# EAGLE board data_proV2.0 - A Curtis (EAGLE 7.7.0)
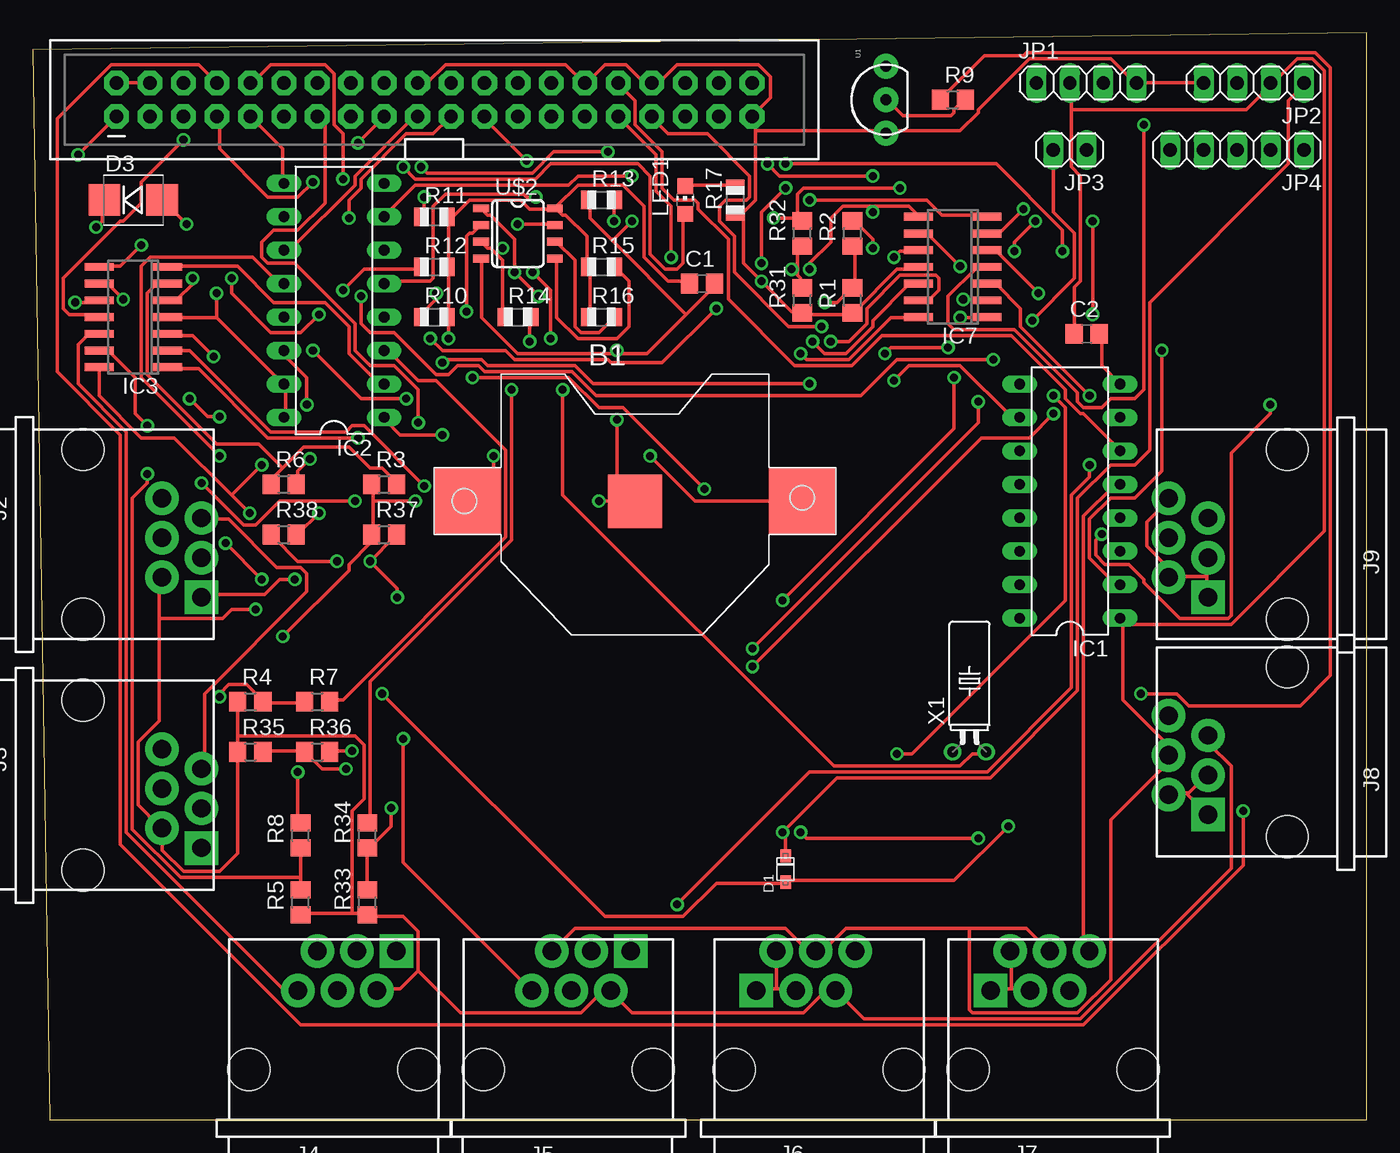
[diagram p0: board, top side]
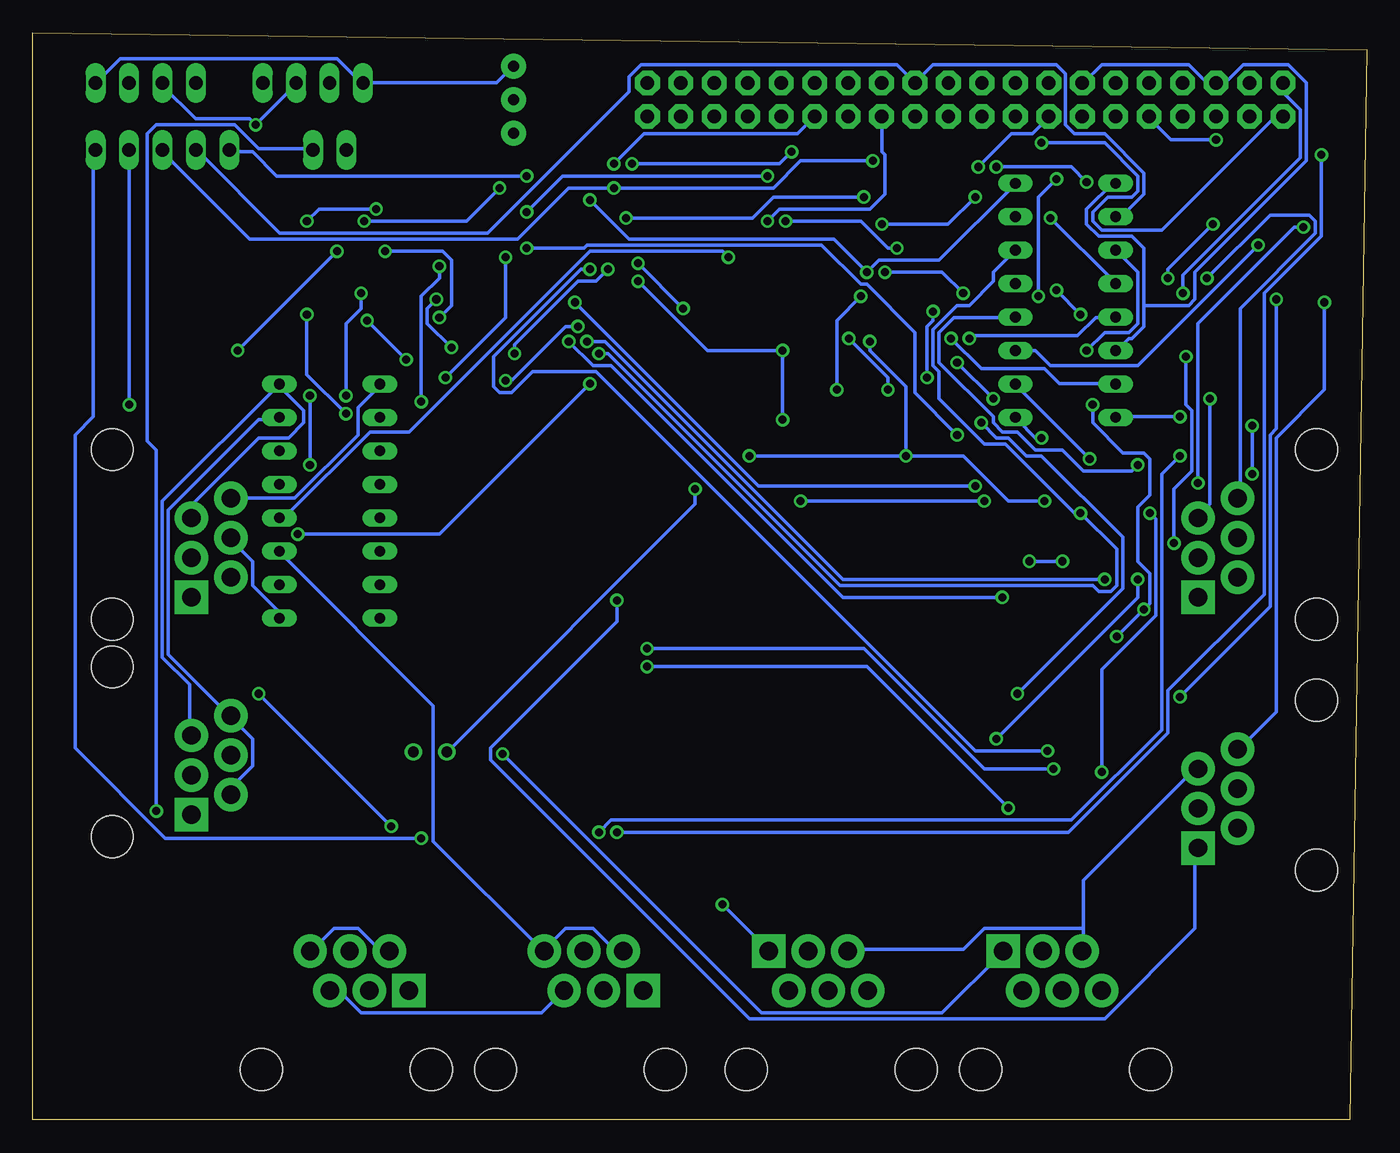
[diagram p1: board, bottom side, seen from below]

Size 101.27 x 82.54 mm. Coordinates in mm from the lower left corner, seen from the top.
Outline: 1.27,0 101.27,0 101.27,82.54 0,81.27 1.27,0
Copper layers (1*16): Top 0.035mm / dielectric 1.5mm / Bottom 0.035mm
Design rules "default": minimum track width 10mil, minimum drill 24mil, track to track 8mil, track to pad 8mil, pad to pad 8mil, via to via 8mil, smd to smd 8mil, copper to edge 40mil, drill to drill 8mil, minimum pad ring 10mil, minimum via ring 8mil, stop-mask expansion 4mil, vias tented up to drill 0mil, thermal gap 10mil

## Footprints (pad centres in the part's own frame; a part is rotated, then mirrored left to right if it is on the bottom)
CR2032-SMD = smd 5.08 x 5.08: +$1 -12.7,0; +$2 12.7,0 | smd 4.064 x 4.064: - 0,0
C0805 = smd 1.3 x 1.5: 1 -0.95,0; 2 0.95,0
SOD-323F = smd 1 x 0.8: A -1,0; C 1,0
SMB-DIODE = smd 2.4 x 2.4: A 2.2,0; C -2.2,0
DIL16 = drill 0.813 long: 1 -8.89,-3.81; 2 -6.35,-3.81; 3 -3.81,-3.81; 4 -1.27,-3.81; 5 1.27,-3.81; 6 3.81,-3.81; 7 6.35,-3.81; 8 8.89,-3.81; 9 8.89,3.81; 10 6.35,3.81; 11 3.81,3.81; 12 1.27,3.81; 13 -1.27,3.81; 14 -3.81,3.81; 15 -6.35,3.81; 16 -8.89,3.81
SO14 = smd 0.6 x 2.2: 1 -3.81,-2.6; 2 -2.54,-2.6; 3 -1.27,-2.6; 4 0,-2.6; 5 1.27,-2.6; 6 2.54,-2.6; 7 3.81,-2.6; 8 3.81,2.6; 9 2.54,2.6; 10 1.27,2.6; 11 0,2.6; 12 -1.27,2.6; 13 -2.54,2.6; 14 -3.81,2.6
2X20-SHROUDED = drill 1.016 pad 1.88 octagon: 1 -1.27,24.13; 2 1.27,24.13; 3 -1.27,21.59; 4 1.27,21.59; 5 -1.27,19.05; 6 1.27,19.05; 7 -1.27,16.51; 8 1.27,16.51; 9 -1.27,13.97; 10 1.27,13.97; 11 -1.27,11.43; 12 1.27,11.43; 13 -1.27,8.89; 14 1.27,8.89; 15 -1.27,6.35; 16 1.27,6.35; 17 -1.27,3.81; 18 1.27,3.81; 19 -1.27,1.27; 20 1.27,1.27; 21 -1.27,-1.27; 22 1.27,-1.27; 23 -1.27,-3.81; 24 1.27,-3.81; 25 -1.27,-6.35; 26 1.27,-6.35; 27 -1.27,-8.89; 28 1.27,-8.89; 29 -1.27,-11.43; 30 1.27,-11.43; 31 -1.27,-13.97; 32 1.27,-13.97; 33 -1.27,-16.51; 34 1.27,-16.51; 35 -1.27,-19.05; 36 1.27,-19.05; 37 -1.27,-21.59; 38 1.27,-21.59; 39 -1.27,-24.13; 40 1.27,-24.13
BTA = drill 1.4 pad 2.54 square: 1 4.75,9 | drill 1.4 pad 2.54: 2 3.25,6; 3 1.75,9; 4 0.25,6; 5 -1.25,9; 6 -2.75,6 | hole 3.2: 6.45,0; -6.45,0
BTD = drill 1.4 pad 2.54 square: 1 -4.75,6 | drill 1.4 pad 2.54: 2 -3.25,9; 3 -1.75,6; 4 -0.25,9; 5 1.25,6; 6 2.75,9 | hole 3.2: 6.45,0; -6.45,0
1X04 = drill 1.016 long: 1 -3.81,0; 2 -1.27,0; 3 1.27,0; 4 3.81,0
1X02 = drill 1.016 long: 1 -1.27,0; 2 1.27,0
1X05 = drill 1.016 long: 1 -5.08,0; 2 -2.54,0; 3 0,0; 4 2.54,0; 5 5.08,0
CHIP-LED0805 = smd 1.2 x 1.2: A 0,-1.05; C 0,1.05
R0805 = smd 1.3 x 1.5: 1 -0.95,0; 2 0.95,0
R0805' = smd 1.1 x 1.4: 1 -1,0; 2 1,0
TO-92-AMMO = drill 0.813 pad 1.88: 1 -2.54,0; 2 0,0; 3 2.54,0
SO08-TIGHT = smd 0.6 x 1.2: 1 -1.905,-2.8; 2 -0.635,-2.8; 3 0.635,-2.8; 4 1.905,-2.8; 5 1.905,2.8; 6 0.635,2.8; 7 -0.635,2.8; 8 -1.905,2.8
TC38H = drill 0.813: 1 -1.27,0; 2 1.27,0

## Placement (x,y rotation side)
B1  CR2032  [CR2032-SMD]  45.72,46.99 0 top
C1  0.1uFd  [C0805]  50.8,63.5 0 top
C2  0.1uFd  [C0805]  80.01,59.69 0 top
D1  [SOD-323F]  57.15,19.05 90 top
D3  [SMB-DIODE]  7.62,69.85 0 top
IC1  4049N  [DIL16]  78.74,46.99 90 top
IC2  MCP3008  [DIL16]  22.86,62.23 90 top
IC3  LM324D  [SO14]  7.62,60.96 90 top
IC7  LM324D  [SO14]  69.85,64.77 90 top
J1  RASPBERRYPI-40-PIN-GPIO  [2X20-SHROUDED]  30.48,77.47 90 top
J2  A2  [BTA]  3.81,44.45 270 top
J3  A3  [BTA]  3.81,25.4 270 top
J4  A4  [BTA]  22.86,3.81 0 top
J5  A1  [BTA]  40.64,3.81 0 top
J6  D1  [BTD]  59.69,3.81 0 top
J7  D2  [BTD]  77.47,3.81 0 top
J8  D3  [BTD]  95.25,27.94 90 top
J9  D4  [BTD]  95.25,44.45 90 top
JP1  [1X04]  80.01,78.74 0 top
JP2  [1X04]  92.71,78.74 180 top
JP3  [1X02]  78.74,73.66 180 top
JP4  [1X05]  91.44,73.66 180 top
LED1  [CHIP-LED0805]  49.53,69.85 0 top
R1  1k  [R0805]  62.23,62.23 90 top
R2  1k  [R0805]  62.23,67.31 90 top
R3  1k  [R0805]  26.67,48.26 0 top
R4  1k  [R0805]  16.51,31.75 0 top
R5  1k  [R0805]  20.32,16.51 90 top
R6  1k  [R0805]  19.05,48.26 0 top
R7  1k  [R0805]  21.59,31.75 0 top
R8  1k  [R0805]  20.32,21.59 90 top
R9  4.7k  [R0805]  69.85,77.47 0 top
R10  N/A?  [R0805']  30.48,60.96 0 top
R11  3.3k  [R0805']  30.48,68.58 0 top
R12  200  [R0805']  30.48,64.77 0 top
R13  1.5M  [R0805']  43.18,69.85 0 top
R14  510K  [R0805']  36.83,60.96 0 top
R15  3.3k  [R0805']  43.18,64.77 0 top
R16  3.3k  [R0805']  43.18,60.96 0 top
R17  1k  [R0805']  53.34,69.85 90 top
R31  1k  [R0805]  58.42,62.23 90 top
R32  1k  [R0805]  58.42,67.31 90 top
R33  1k  [R0805]  25.4,16.51 90 top
R34  1k  [R0805]  25.4,21.59 90 top
R35  1k  [R0805]  16.51,27.94 0 top
R36  1k  [R0805]  21.59,27.94 0 top
R37  1k  [R0805]  26.67,44.45 0 top
R38  1k  [R0805]  19.05,44.45 0 top
U1  DS18B20  [TO-92-AMMO]  64.77,77.47 90 top
U$2  DS1307SO8-TIGHT  [SO08-TIGHT]  36.83,67.31 270 top
X1  32.768khz  [TC38H]  71.12,27.94 0 top

## Library data of the parts
B1 D1 IC2 R10-R17 = adafruit
C1 C2 R1-R9 R31-R38 = resistor
D3 = SparkFun-DiscreteSemi; PROD_ID: DIO-09646
IC1 = 40xx
IC3 IC7 = linear
J1 = SparkFun-Boards
J2-J9 = SparkFun-Connectors
JP1-JP4 = pinhead
LED1 = led
U1 = SparkFun-Sensors; STORE_ID: SEN-00245
U$2 = SparkFun-FreqCtrl; PROD_ID: IC-08138
X1 = crystal; OC_FARNELL: unknown; OC_NEWARK: unknown

## Nets
3.3V: D1.C J1.1 J1.17 JP1.1 JP2.1 U1.3
5V: C1.1 C2.1 IC1.1 IC2.15 IC2.16 IC3.4 J1.2 J1.4 J2.5 J3.5 J4.5 J5.5 J6.4 J7.4 J8.4 J9.4 JP1.2 JP2.2 R10.2 R11.2 R12.2 R15.1 R16.1 U$2.8
+15V: IC7.4 JP1.3 JP2.3
A1: IC2.1 IC3.1 R2.2
A2: IC2.2 IC3.7 R6.2
A3: IC2.3 IC3.8 R7.2
A4: IC2.4 IC3.14 R8.2
A5: IC2.5 IC7.1 R32.2
A6: IC2.6 IC7.14 R38.2
A7: IC2.7 IC7.8 R36.2
A8: IC2.8 IC7.7 R34.2
BATT: R13.2 R14.1 U$2.3
CE: J1.15 JP4.5
CSN: IC2.10 J1.24 JP4.4
D1: IC1.2 J1.29
D2: IC1.4 J1.31
D3: IC1.6 J1.32
D4: IC1.10 J1.33
DQ: D1.A J1.13 R9.1
GND: B1.- C1.2 C2.2 IC1.8 IC2.9 IC2.14 IC3.11 IC7.11 J1.6 J1.9 J1.14 J1.20 J1.25 J1.30 J1.34 J1.39 J2.2 J3.2 J4.2 J5.2 J6.5 J7.5 J8.5 J9.5 JP1.4 JP2.4 R1.1 R3.1 R4.1 R5.1 R13.1 R17.1 R31.1 R33.1 R35.1 R37.1 U1.1 U$2.4
MISO: IC2.12 J1.21 JP4.1
MOSI: IC2.11 J1.19 JP4.2
N$1: U$2.2 X1.1
N$2: R10.1 U$2.1 X1.2
N$3: B1.+$1 B1.+$2 D3.C R14.2
N$4: J1.7 LED1.A
N$5: IC3.2 R1.2 R2.1
N$6: R9.2 U1.2
N$7: IC3.13 R5.2 R8.1
N$8: IC3.6 R3.2 R6.1
N$10: D3.A R12.1
N$11: IC1.3 J6.1 J6.2 J6.3 J6.6
N$12: IC1.5 J7.1 J7.2 J7.3 J7.6
N$14: IC1.7 J8.1 J8.2 J8.3 J8.6
N$15: IC1.9 J9.1 J9.2 J9.3 J9.6
N$16: IC3.9 R4.2 R7.1
N$17: LED1.C R17.2
N$30: IC3.3 J5.6
N$31: IC7.2 R31.2 R32.1
N$32: IC7.3 J5.1
N$33: IC7.6 R33.2 R34.1
N$34: IC7.9 R35.2 R36.1
N$35: IC7.13 R37.2 R38.1
N$36: IC7.12 J2.1
RX: J1.10 JP3.2
S1-5V1: IC3.5 J2.6
S1-5V2: IC3.10 J3.6
S1-5V3: IC7.5 J4.1
S1-5V4: IC3.12 J4.6
S1-5V5: IC7.10 J3.1
SCK: IC2.13 J1.23 JP4.3
SCL: R16.2 U$2.6
SDA: R15.2 U$2.5
SQ: R11.1 U$2.7
TX: J1.8 JP3.1

## Tracks (layer width: path | path; a pad name or v marks a point on that pad's centre or on a via)
3.3V  (via drill 0.61)
  Top 0.254: v24.69,74.19 26.52,76.02 J1.17 | 57.15,21.84 57.15,22.07 61.04,25.96 72.69,25.96 79.32,32.59 79.32,47.22 81.84,49.73 83.67,49.73 84.81,50.88 84.81,62.08 95.33,72.59 95.33,77.39 96.47,78.54 JP2.1 | 57.15,21.84 D1.C | v3.43,73.28 J1.1 | 57.15,21.84 v56.92,21.84
  Bottom 0.254: v24.69,74.19 19.89,74.19 17.37,71.68 17.37,70.54 17.83,70.08 19.66,70.08 20.8,68.94 20.8,68.25 20.12,67.56 15.54,67.56 7.09,76.02 6.4,76.02 J1.1 | U1.3 64.92,79.91 66.06,78.77 76.12,78.77 JP1.1 76.35,78.77 78.18,80.59 94.64,80.59 96.47,78.77 JP2.1 | v3.43,73.28 3.43,67.11 7.77,62.76 7.77,39.9 15.09,32.59 15.09,29.39 22.63,21.84 v56.92,21.84
5V  (via drill 0.61)
  Top 0.254: U$2.8 39.78,69.16 40.23,68.71 40.46,68.71 42.06,67.11 42.06,64.82 R15.1 42.29,64.59 42.29,61.16 R16.1 | C1.1 49.84,63.68 48.23,63.68 46.41,65.51 46.41,69.39 44.81,70.99 41.38,70.99 39.78,69.39 U$2.8 | U$2.8 39.55,69.16 37.72,69.16 37.03,69.85 33.15,69.85 32,68.71 31.55,68.71 R11.2 31.55,68.48 31.55,64.82 R12.2 31.55,64.59 31.55,61.16 R10.2 31.55,60.94 v31.55,59.33 | J1.2 6.4,78.77 8.69,78.77 J1.4 | 13.95,60.94 10.29,60.94 IC3.4 | 13.95,60.94 18.97,55.91 IC2.15 19.2,55.68 19.2,53.39 IC2.16 | 13.95,60.94 v13.95,62.76 | 78.87,76.71 78.87,78.54 JP1.2 | 78.87,76.71 78.87,72.36 79.55,71.68 79.55,63.68 79.1,63.22 79.1,59.79 C2.1 | 78.87,76.71 92.13,76.71 93.95,78.54 JP2.2 94.18,78.77 96.01,80.59 97.16,80.59 98.07,79.68 98.07,44.7 90.98,37.62 82.75,37.62 | 82.75,37.62 82.75,38.08 IC1.1 82.75,37.62 | 82.75,37.62 82.75,31.9 86.18,28.47 86.18,27.79 J8.4 86.18,27.56 86.18,27.1 81.84,22.76 81.84,10.64 79.32,8.13 71.32,8.13 71.09,8.36 71.09,14.53 | 71.09,14.53 75.44,14.53 77.04,12.93 J7.4 | 71.09,14.53 61.72,14.53 60.12,12.93 59.66,12.93 J6.4 59.44,12.93 58.75,12.93 57.15,14.53 41.15,14.53 39.55,12.93 J5.5 | J2.5 13.03,45.62 14.86,45.62 18.52,41.96 20.34,41.96 20.8,41.5 20.8,40.13 13.03,32.36 13.03,26.87 J3.5 | v14.17,53.39 13.26,53.39 v11.89,54.76
  Bottom 0.254: v13.95,62.76 13.95,64.14 5.03,73.05 5.03,76.71 6.17,77.85 6.17,78.54 J1.2 | v31.55,59.33 29.26,57.05 24.46,57.05 23.32,55.91 19.2,55.91 IC2.15 | IC1.1 82.75,38.3 82.75,38.76 84.58,40.59 84.58,42.42 86.18,44.02 J9.4 | 21.49,14.53 21.49,18.19 13.03,26.64 J3.5 | 21.49,14.53 21.49,12.93 J4.5 | 21.49,14.53 29.03,14.53 30.63,12.93 39.32,12.93 J5.5 | v14.17,53.39 18.97,53.39 IC2.16 | v11.89,54.76 11.89,46.76 12.8,45.85 J2.5
+15V  (via drill 0.61)
  Top 0.254: v84.35,75.56 84.35,55.45 83.67,54.76 81.84,54.76 81.15,54.08 79.78,54.08 79.32,54.53 79.32,55.22 74.52,60.02 69.95,60.02 69.49,60.48 69.49,62.54 71.55,64.59 72.24,64.59 IC7.4
  Bottom 0.254: JP1.3 81.38,78.54 v84.35,75.56 84.81,76.02 88.92,76.02 91.44,78.54 JP2.3
A1  (via drill 0.61)
  Top 0.254: v63.78,66.19 63.78,66.88 62.41,68.25 R2.2 | v31.09,52.02 27.89,52.02 26.75,53.16 IC2.1 | v24.69,51.79 17.83,51.79 12.57,57.05 10.29,57.05 IC3.1
  Bottom 0.254: v63.78,66.19 59.44,66.19 59.21,66.42 41.38,66.42 38.41,63.45 37.95,63.45 34.29,59.79 34.29,55.22 v31.09,52.02 | v24.69,51.79 25.15,51.79 26.52,53.16 IC2.1
A2  (via drill 0.61)
  Top 0.254: v21.03,50.19 20.12,49.28 20.12,48.36 R6.2 | IC3.7 10.29,64.82 15.54,64.82 18.29,62.08 22.17,62.08 24,60.25 24,58.19 26.52,55.68 IC2.2
  Bottom 0.254: v21.03,50.19 26.52,55.68 IC2.2
A3  (via drill 0.61)
  Top 0.254: IC2.3 26.98,58.42 29.26,56.13 30.63,56.13 35.89,50.88 35.89,44.25 23.55,31.9 22.63,31.9 R7.2 | v8.23,66.42 6.63,64.82 5.03,64.82 IC3.8
  Bottom 0.254: v8.23,66.42 17.37,57.28 24,57.28 25.15,58.42 IC2.3
A4  (via drill 0.61)
  Top 0.254: v20.12,26.42 20.12,22.76 R8.2 | 15.09,47.45 10.74,51.79 8.23,51.79 5.03,54.99 5.03,57.05 IC3.14 | 15.09,47.45 v16.46,46.08 | 15.09,47.45 v17.37,49.73
  Bottom 0.254: v20.12,26.42 20.12,34.19 16,38.3 16,45.62 v16.46,46.08 | v17.37,49.73 17.83,49.28 21.49,49.28 23.09,50.88 25.15,50.88 26.52,52.25 27.66,52.25 28.35,52.93 28.35,53.39 32.46,57.51 32.46,59.79 31.32,60.94 26.75,60.94 IC2.4
A5  (via drill 0.61)
  Top 0.254: v56.24,68.48 58.06,68.48 | 58.06,68.48 58.29,68.48 R32.2 58.06,68.48 | v38.18,70.08 37.49,70.08 37.26,70.31 31.32,70.31 30.4,69.39 30.4,63.91 30.18,63.68 26.75,63.68 IC2.5 | v70.41,60.94 72.24,60.94 IC7.1 | v74.52,65.96 74.52,66.65 v76.12,68.25 | v65.84,70.76 58.52,70.76 58.06,70.31 58.06,68.48
  Bottom 0.254: v56.24,68.48 46.63,68.48 45.03,70.08 v38.18,70.08 | v70.41,60.94 69.49,61.85 69.49,65.28 70.18,65.96 v74.52,65.96 | v76.12,68.25 68.35,68.25 v65.84,70.76
A6  (via drill 0.61)
  Top 0.254: v21.72,46.08 20.12,44.48 R38.2 | v58.29,58.19 58.75,57.73 61.95,57.73 65.15,60.94 67.21,60.94 IC7.14
  Bottom 0.254: IC2.6 28.35,64.36 28.35,63.68 30.18,61.85 31.09,61.85 32.92,60.02 32.92,57.28 32.46,56.82 32.46,54.76 29.03,51.33 27.43,51.33 22.17,46.08 v21.72,46.08 18.97,43.33 18.97,40.59 19.43,40.13 20.34,40.13 20.8,40.59 40.01,40.59 57.61,58.19 v58.29,58.19
A7  (via drill 0.61)
  Top 0.254: v24.23,28.02 22.63,28.02 R36.2 | v58.98,64.59 58.98,65.05 60.58,66.65 60.58,68.48 61.49,69.39 63.78,69.39 | 63.78,69.39 66.52,69.39 67.21,68.71 IC7.8 | v45.49,71.68 41.38,71.68 40.69,70.99 29.03,70.99 26.75,68.71 IC2.7 | 63.78,69.39 v63.78,68.94
  Bottom 0.254: v24.23,28.02 29.72,28.02 58.52,56.82 63.32,56.82 64.92,55.22 65.84,55.22 66.29,55.68 66.29,57.96 59.66,64.59 v58.98,64.59 | v45.49,71.68 61.04,71.68 v63.78,68.94
A8  (via drill 0.61)
  Top 0.254: v36.35,55.45 36.35,44.02 25.6,33.27 25.6,22.76 R34.2 | v39.32,59.33 39.32,62.99 v37.95,64.36 | v58.98,69.85 67.89,69.85 69.04,68.71 72.24,68.71 IC7.7
  Bottom 0.254: v36.35,55.45 36.35,56.36 v39.32,59.33 | IC2.8 26.75,70.99 32.46,65.28 37.03,65.28 v37.95,64.36 40.46,66.88 56.01,66.88 v58.98,69.85
BATT  (via drill 0.61)
  Top 0.254: 35.2,65.73 35.66,65.28 35.66,61.16 R14.1 | 35.2,65.73 34.75,66.19 34.52,66.19 34.06,66.65 U$2.3 | v44.12,68.25 44.12,69.85 R13.2 | 35.2,65.73 v35.66,66.19
  Bottom 0.254: v44.12,68.25 38.41,68.25 36.35,66.19 v35.66,66.19
CE  (via drill 0.61)
  Top 0.254: v63.78,71.68 56.69,71.68 v55.78,72.59 | v43.66,73.51 39.55,73.51 37.95,71.91 29.95,71.91 v29.49,72.36
  Bottom 0.254: v63.78,71.68 82.75,71.68 84.58,73.51 86.18,73.51 JP4.5 | v55.78,72.59 44.58,72.59 v43.66,73.51 | v29.49,72.36 26.98,74.88 25.38,74.88 24.23,76.02 J1.15
CSN
  Bottom 0.254: 34.29,78.77 32.92,80.14 23.55,80.14 22.86,79.45 22.86,75.56 22.17,74.88 19.89,74.88 16.92,71.91 16.92,70.31 18.52,68.71 18.97,68.71 IC2.10 | 34.29,78.77 35.66,80.14 55.09,80.14 56.01,79.22 56.01,78.08 66.75,67.33 82.53,67.33 88.7,73.51 JP4.4 | 34.29,78.77 J1.24
D1  (via drill 0.61)
  Top 0.254: v85.72,58.42 85.72,49.28 83.67,47.22 81.84,47.22 80.24,45.62 80.24,42.65 82.07,40.82 82.53,40.82 IC1.2 | v78.18,65.96 78.18,67.56 73.15,72.59 v57.15,72.59
  Bottom 0.254: v78.18,65.96 v85.72,58.42 | v57.15,72.59 54.86,74.88 43.2,74.88 42.06,76.02 J1.29
D2  (via drill 0.61)
  Top 0.254: v48.46,65.51 48.46,69.39 47.32,70.54 47.32,73.28 44.58,76.02 J1.31
  Bottom 0.254: v48.46,65.51 48.92,65.96 58.98,65.96 72.69,52.25 75.67,52.25 82.07,45.85 82.53,45.85 IC1.4
D3
  Top 0.254: IC1.6 82.53,50.88 79.78,53.62 79.55,53.62 78.41,54.76 78.41,55.45 74.3,59.56 64.47,59.56 62.18,57.28 57.84,57.28 52.81,62.31 52.81,66.88 50.52,69.16 50.52,69.62 50.29,69.85 48.69,69.85 47.78,70.76 47.78,73.51 45.72,75.56 45.72,77.39 44.58,78.54 J1.32
D4  (via drill 0.61)
  Top 0.254: v65.38,56.13 66.52,57.28 70.41,57.28 74.3,53.39 74.75,53.39 IC1.10 | v59.89,60.25 57.38,60.25 53.26,64.36 53.26,67.11 52.12,68.25 52.12,69.39 52.58,69.85 54.18,69.85 54.41,70.08 54.41,71.68 51.21,74.88 48.23,74.88 47.09,76.02 J1.33
  Bottom 0.254: v65.38,56.13 64.92,56.13 60.81,60.25 v59.89,60.25
DQ  (via drill 0.61)
  Top 0.254: v26.52,32.36 43.43,15.44 49.38,15.44 51.89,17.96 57.15,17.96 D1.A 57.15,18.19 69.95,18.19 v74.07,22.3 | v29.26,52.93 29.26,55.45 27.43,57.28 25.6,57.28 24.46,58.42 24.46,60.48 19.89,65.05 17.83,65.05 17.37,65.51 17.37,66.65 18.29,67.56 20.12,67.56 22.17,69.62 22.17,75.56 21.72,76.02 J1.13 | v84.12,32.36 86.87,32.36 87.78,31.45 96.24,31.45 98.53,33.73 98.53,79.91 97.38,81.05 75.44,81.05 75.21,80.82 72.24,80.82 69.04,77.62 R9.1
  Bottom 0.254: v26.52,32.36 18.52,40.36 18.52,44.25 24.69,50.42 25.83,50.42 27.2,51.79 28.12,51.79 v29.26,52.93 | v74.07,22.3 v84.12,32.36
GND  (via drill 0.61)
  Top 0.254: 25.83,46.99 25.83,48.13 R3.1 | 25.83,46.99 25.83,44.48 R37.1 25.6,44.25 25.6,43.79 24,42.19 24,41.73 v18.97,36.7 | v29.03,46.99 25.83,46.99 | 44.35,46.99 v42.98,46.99 | 44.35,58.19 46.63,58.19 49.61,61.16 | 44.35,58.19 36.8,58.19 34.06,60.94 34.06,65.28 U$2.4 | 49.61,61.16 51.89,63.45 C1.2 | 49.61,61.16 43.89,66.88 | 43.89,66.88 42.29,68.48 42.29,69.85 R13.1 | v45.49,68.25 44.12,66.88 43.89,66.88 | v44.35,53.16 44.35,46.99 | 44.35,58.19 v44.35,58.42 | 44.35,46.99 B1.- | J1.20 29.26,78.77 29.95,78.77 31.32,80.14 40.46,80.14 41.83,78.77 J1.30 42.06,78.77 43.43,80.14 45.03,80.14 46.41,78.77 46.86,78.77 J1.34 47.09,78.77 47.55,78.77 48.92,80.14 55.09,80.14 56.01,79.22 56.01,77.62 54.63,76.25 J1.39 54.63,76.02 54.86,75.79 54.86,75.11 | IC7.11 67.21,64.59 65.61,64.59 62.41,61.39 R1.1 62.18,61.16 58.52,61.16 R31.1 58.29,61.39 57.61,61.39 v55.32,63.68 53.95,65.05 53.95,68.94 | JP2.4 88.7,78.77 83.9,78.77 JP1.4 83.67,78.77 81.84,80.59 75.67,80.59 71.78,76.71 71.78,76.48 70.41,75.11 64.92,75.11 U1.1 64.69,75.11 54.86,75.11 | 53.95,68.94 53.49,68.94 R17.1 53.95,68.94 | 53.95,68.94 54.86,69.85 54.86,75.11 | IC1.8 81.15,57.28 81.15,59.56 C2.2 | v11.43,74.42 8.23,71.22 8.23,69.62 6.86,68.25 6.63,68.25 2.29,63.91 2.29,61.62 2.74,61.16 4.8,61.16 IC3.11 | J1.9 18.97,73.74 18.97,71.22 IC2.9 | 15.54,29.16 15.54,31.67 R4.1 | 15.54,29.16 15.54,28.02 R35.1 15.54,27.79 15.54,20.24 14.17,18.87 11.43,18.87 9.83,20.47 9.83,22.07 J3.2 9.6,22.3 8,23.9 8,28.7 9.6,30.3 9.6,38.08 | 9.6,38.08 9.6,41.05 J2.2 | 24.23,15.67 25.38,15.67 R33.1 25.6,15.44 28.12,15.44 29.26,14.3 29.26,11.33
  Top 0.254: 24.23,15.67 20.34,15.67 R5.1 | 29.26,11.33 27.89,9.96 26.29,9.96 J4.2 | 29.26,11.33 32.46,8.13 41.6,8.13 43.2,9.73 43.66,9.73 J5.2 43.89,9.73 45.49,8.13 58.52,8.13 60.12,9.73 60.81,9.73 J6.5 61.04,9.73 63.09,7.67 79.55,7.67 90.98,19.1 90.98,26.87 89.38,28.47 89.38,29.16 J8.5 | 15.54,29.16 24.46,29.16 25.15,28.47 25.15,24.36 24.23,23.44 24.23,15.67 | v20.8,54.3 20.8,56.36 19.2,57.96 19.2,58.42 IC2.14 | v16.92,38.76 15.09,38.76 14.4,38.08 9.6,38.08
  Bottom 0.254: v42.98,46.99 v29.03,46.99 | v45.49,68.25 44.58,69.16 37.72,69.16 36.58,70.31 36.58,73.28 36.8,73.51 36.8,76.02 J1.25 | v44.35,53.16 v44.35,58.42 50.06,58.42 v55.32,63.68 | J9.5 89.15,45.85 89.15,46.76 84.12,51.79 81.84,51.79 80.7,52.93 80.7,53.85 82.53,55.68 IC1.8 91.44,46.99 91.44,35.1 89.38,33.05 89.38,29.39 J8.5 | 11.43,78.77 12.12,78.77 13.49,80.14 20.12,80.14 21.49,78.77 J1.14 | 16.92,61.85 16.92,66.19 17.83,67.11 20.34,67.11 21.26,68.02 21.26,69.16 19.2,71.22 IC2.9 | 16.92,61.85 16.92,60.25 17.83,59.33 18.06,59.33 18.97,58.42 IC2.14 | v11.43,74.42 14.86,74.42 16.46,76.02 J1.9 | 11.43,78.77 10.74,78.77 9.37,80.14 5.94,80.14 4.57,78.77 4.57,72.82 13.03,64.36 13.03,62.31 13.49,61.85 16.92,61.85 | 11.43,78.77 J1.6 | J7.5 78.64,9.73 77.95,9.73 76.35,8.13 62.64,8.13 61.04,9.73 J6.5 | v20.8,54.3 20.8,52.93 18.52,50.65 16.92,50.65 16.46,50.19 16.46,47.45 17.37,46.53 17.37,42.42 16.46,41.5 16.46,39.22 v16.92,38.76 v18.97,36.7
MISO  (via drill 0.61)
  Top 0.254: v24,68.48 24,69.85 24.92,70.76 24.92,71.45 28.35,74.88 30.4,74.88 31.55,76.02 J1.21 | v71.78,21.39 58.75,21.39 v58.29,21.84 | v14.17,50.42 8.23,56.36 8.23,64.82 8.91,65.51 16.69,65.51 18.52,63.68 18.97,63.68 IC2.12
  Bottom 0.254: v24,68.48 19.2,63.68 IC2.12 | v71.78,21.39 91.21,21.39 98.07,28.25 98.07,52.02 96.7,53.39 96.7,73.51 JP4.1 | v58.29,21.84 57.38,22.76 22.4,22.76 15.54,29.62 15.54,49.05 v14.17,50.42
MOSI  (via drill 0.61)
  Top 0.254: IC2.11 19.2,66.19 19.66,66.19 24.46,70.99 24.46,71.68 29.03,76.25 J1.19 | v93.95,54.3 93.95,53.62 90.98,50.65 90.98,38.3 90.75,38.08 87.1,38.08 84.35,40.82 84.35,41.05 83.21,42.19 81.38,42.19 80.7,42.88 80.7,44.02 v81.15,44.48 | v58.98,55.91 42.52,55.91 41.15,57.28 34.52,57.28 34.06,57.73 31.32,57.73 v31.09,57.51 | v28.35,54.76 24.92,54.76 v21.26,58.42
  Bottom 0.254: v93.95,54.3 93.95,73.51 JP4.2 | v81.15,44.48 70.41,44.48 v58.98,55.91 | v28.35,54.76 v31.09,57.51 | v21.26,58.42 19.89,59.79 18.06,59.79 17.37,60.48 17.37,64.36 IC2.11
N$1  (via drill 0.61)
  Top 0.254: v32.92,61.39 32.92,67.11 33.15,67.33 33.38,67.33 33.83,67.79 U$2.2 | v33.38,56.36 40.69,56.36 42.98,54.08 44.81,54.08 v50.98,47.9
  Bottom 0.254: v32.92,61.39 32.92,60.71 33.38,60.25 v33.38,56.36 | v50.98,47.9 50.98,46.76 69.72,28.02 X1.1
N$2  (via drill 0.61)
  Top 0.254: v30.63,62.76 30.63,62.31 29.49,61.16 R10.1 | U$2.1 34.06,69.16 34.52,68.71 34.75,68.71 36.58,66.88 v36.58,64.36 v38.41,62.54 | v40.23,55.45 40.23,47.45 60.81,26.87 70.41,26.87 71.32,27.79 72.24,27.79 X1.2
  Bottom 0.254: v36.58,64.36 32.23,64.36 v30.63,62.76 | v40.23,55.45 40.23,60.71 v38.41,62.54
N$3  (via drill 0.61)
  Top 0.254: v37.72,59.11 37.72,60.94 R14.2 | v34.98,50.42 34.98,48.82 33.15,46.99 B1.+$1 | v4.8,67.79 5.26,68.25 5.26,69.85 D3.C | v12.8,48.36 16,45.16 16.92,45.16 18.75,46.99 v24.46,46.99 | B1.+$2 50.29,46.99 v46.86,50.42
  Bottom 0.254: v37.72,59.11 37.72,58.42 34.98,55.68 v34.98,50.42 | v4.8,67.79 5.49,67.79 12.8,60.48 v12.8,48.36 | v24.46,46.99 27.2,46.99 30.63,50.42 v34.98,50.42 | v34.98,50.42 v46.86,50.42
N$4  (via drill 0.61)
  Top 0.254: v28.12,72.36 29.03,71.45 38.18,71.45 39.32,72.59 45.95,72.59 46.86,71.68 46.86,65.73 48.01,64.59 48.92,64.59 49.38,65.05 49.38,68.71 LED1.A | v21.26,71.22 20.12,70.08 17.83,70.08 14.17,73.74 14.17,76.02 J1.7
  Bottom 0.254: v28.12,72.36 22.4,72.36 v21.26,71.22
N$5  (via drill 0.61)
  Top 0.254: R2.1 62.41,66.19 62.41,63.22 R1.2 62.18,63.22 61.04,62.08 v60.12,62.08 | IC3.2 11.89,58.42 18.06,52.25 23.77,52.25 24.23,52.71 25.15,52.71 v29.72,48.13
  Bottom 0.254: v29.72,48.13 46.18,48.13 v60.12,62.08
N$6
  Top 0.254: R9.2 70.64,77.39 69.95,76.71 69.95,76.48 69.72,76.25 66.06,76.25 64.92,77.39 U1.2
N$7  (via drill 0.61)
  Top 0.254: 20.34,18.41 20.34,20.47 R8.1 | 20.34,18.41 20.34,17.5 R5.2 | IC3.13 5.71,58.42 7.77,56.36 7.77,53.62 v8.69,52.71 | v8.69,49.05 8.69,48.36 7.54,47.22 7.54,22.07 11.2,18.41 20.34,18.41
  Bottom 0.254: v8.69,49.05 v8.69,52.71
N$8
  Top 0.254: 18.97,49.51 20.57,51.11 24,51.11 25.6,49.51 26.52,49.51 27.66,48.36 R3.2 | 18.97,49.51 18.29,48.82 18.29,48.36 R6.1 | 18.97,49.51 17.14,51.33 13.95,51.33 8.69,56.59 8.69,62.76 9.37,63.45 10.06,63.45 IC3.6
N$10  (via drill 0.61)
  Top 0.254: v23.55,62.99 25.15,64.59 29.26,64.59 R12.1 | v21.72,61.16 20.34,59.79 18.06,59.79 15.09,62.76 v15.09,63.91 | v11.66,68.02 D3.A
  Bottom 0.254: v21.72,61.16 v23.55,62.99 | v15.09,63.91 15.09,64.59 v11.66,68.02
N$11
  Top 0.254: 56.46,9.96 57.84,9.96 J6.3 | 56.46,9.96 55.09,9.96 J6.1 | 56.46,9.96 56.46,12.7 J6.2
  Bottom 0.254: IC1.3 82.53,43.1 70.87,31.45 70.87,21.16 62.64,12.93 J6.6 62.41,12.93 60.81,14.53 58.75,14.53 57.15,12.93 56.46,12.93 J6.2
N$12
  Top 0.254: 74.3,9.96 75.67,9.96 J7.3 | 74.3,9.96 72.92,9.96 J7.1 | 74.3,9.96 74.3,12.7 J7.2 | IC1.5 82.53,48.13 82.07,48.13 79.78,45.85 79.78,13.16 80.01,12.93 J7.6
  Bottom 0.254: J7.2 74.3,12.93 74.98,12.93 76.58,14.53 78.41,14.53 80.01,12.93 J7.6
N$14
  Top 0.254: 87.55,24.82 87.78,24.82 89.15,26.19 J8.3 | 87.55,24.82 86.41,24.82 J8.2 | 87.55,24.82 89.15,23.22 J8.1
  Bottom 0.254: IC1.7 82.75,53.16 84.12,53.16 90.98,46.3 90.98,35.33 86.41,30.76 J8.6 86.18,30.53 84.58,28.93 84.58,26.87 86.18,25.27 86.18,24.82 J8.2
N$15
  Top 0.254: 89.15,41.28 89.15,42.65 J9.3 | 89.15,41.28 89.15,39.9 J9.1 | 89.15,41.28 86.41,41.28 J9.2 86.18,41.28 86.18,41.96 84.58,43.56 84.58,45.39 86.18,46.99 J9.6
  Bottom 0.254: IC1.9 74.98,55.68 76.58,54.08 76.58,52.02 81.38,47.22 86.18,47.22 J9.6
N$16  (via drill 0.61)
  Top 0.254: R7.1 20.57,31.67 17.6,31.67 R4.2 17.37,31.9 16.23,33.05 14.86,33.05 14.17,32.36 v14.17,32.13 | v6.86,62.31 5.71,63.45 5.03,63.45 IC3.9
  Bottom 0.254: v6.86,62.31 6.86,52.48 7.32,52.02 7.32,38.99 v14.17,32.13
N$17
  Top 0.254: LED1.C 49.61,70.99 53.26,70.99 R17.2
N$30  (via drill 0.61)
  Top 0.254: v13.72,57.96 12.12,59.56 10.29,59.56 IC3.3 | v17.37,41.05 v14.63,43.79 | v28.12,28.93 28.12,19.56 37.72,9.96 J5.6
  Bottom 0.254: v13.72,57.96 13.72,54.3 13.26,53.85 13.26,49.28 14.63,47.9 v14.63,43.79 | v17.37,41.05 17.37,39.68 v28.12,28.93
N$31  (via drill 0.61)
  Top 0.254: 58.06,64.59 58.06,65.96 58.29,66.19 R32.1 | 58.06,64.59 58.06,64.14 58.29,63.91 58.29,63.22 R31.2 | v70.64,62.31 72.24,62.31 IC7.2 | v69.49,58.65 65.15,58.65 v64.69,58.19 | 58.06,64.59 v57.61,64.59
  Bottom 0.254: v70.64,62.31 71.32,61.62 71.32,60.48 v69.49,58.65 | v64.69,58.19 64.69,58.88 59.89,63.68 58.52,63.68 v57.61,64.59
N$32  (via drill 0.61)
  Top 0.254: v80.24,54.99 74.98,60.25 74.98,61.62 73.15,63.45 72.47,63.45 IC7.3 | v80.24,49.73 80.24,48.82 78.87,47.45 78.87,32.82 72.47,26.42 58.98,26.42 v48.92,16.36
  Bottom 0.254: v80.24,49.73 v80.24,54.99 | v48.92,16.36 45.49,12.93 J5.1
N$33  (via drill 0.61)
  Top 0.254: R33.2 25.38,17.5 25.38,20.47 R34.1 25.6,20.7 27.2,22.3 v27.2,23.67 | v75.21,69.16 73.38,67.33 72.47,67.33 IC7.6 | v80.47,61.16 v80.47,68.25 | v77.5,53.62 75.67,51.79 72.01,51.79 v54.63,34.42
  Bottom 0.254: v75.21,69.16 79.55,69.16 v80.47,68.25 | v80.47,61.16 80.47,56.59 v77.5,53.62 | v54.63,34.42 37.95,34.42 v27.2,23.67
N$34  (via drill 0.61)
  Top 0.254: R35.2 17.6,28.02 20.57,28.02 R36.1 20.8,27.79 21.95,26.64 v23.77,26.64 | v70.41,64.82 68.12,67.11 67.44,67.11 IC7.9 | v71.78,54.53 71.78,52.93 v54.63,35.79
  Bottom 0.254: v70.41,64.82 70.41,63.91 71.78,62.54 v71.78,54.53 | v54.63,35.79 38.18,35.79 29.03,26.64 v23.77,26.64
N$35  (via drill 0.61)
  Top 0.254: v23.09,42.42 20.12,42.42 18.29,44.25 R38.1 | R37.2 27.43,44.25 v25.6,42.42 27.66,40.36 v27.66,39.68 | v60.58,59.11 61.95,59.11 63.32,60.48 63.32,61.62 65.84,64.14 68.58,64.14 68.81,63.91 68.81,62.99 68.12,62.31 67.44,62.31 IC7.13
  Bottom 0.254: v25.6,42.42 v23.09,42.42 | v60.58,59.11 58.75,57.28 57.38,57.28 39.78,39.68 v27.66,39.68
N$36  (via drill 0.61)
  Top 0.254: v59.21,59.11 60.12,58.19 61.72,58.19 63.78,60.25 63.78,60.71 66.52,63.45 67.21,63.45 IC7.12 | v19.89,41.05 18.75,41.05 17.6,39.9 13.03,39.9 J2.1
  Bottom 0.254: v59.21,59.11 57.84,59.11 39.78,41.05 v19.89,41.05
RX  (via drill 0.61)
  Top 0.254: v75.89,60.71 79.1,63.91 79.1,67.33 77.5,68.94 77.5,73.51 JP3.2 | v72.92,57.73 65.61,57.73 62.87,54.99 42.75,54.99 40.92,56.82 34.29,56.82 33.83,57.28 32.23,57.28 31.55,56.59 30.63,56.59 27.43,59.79 25.6,59.79 24.92,60.48 v24.92,62.54 | v23.55,71.45 23.55,74.88 22.86,75.56 22.86,79.45 22.17,80.14 18.06,80.14 16.69,78.77 J1.10
  Bottom 0.254: v72.92,57.73 v75.89,60.71 | v24.92,62.54 24.92,70.08 v23.55,71.45
S1-5V1  (via drill 0.61)
  Top 0.254: v12.12,63.91 12.12,63.45 10.97,62.31 10.29,62.31 IC3.5
  Bottom 0.254: v12.12,63.91 7.32,68.71 4.34,68.71 3.89,68.25 3.89,67.33 9.6,61.62 9.6,47.22 J2.6
S1-5V2  (via drill 0.61)
  Top 0.254: v3.2,62.08 4.8,62.08 IC3.10
  Bottom 0.254: v3.2,62.08 3.2,55.45 6.86,51.79 6.86,30.99 9.6,28.25 J3.6
S1-5V3  (via drill 0.61)
  Top 0.254: v76.35,62.76 73.15,65.96 72.47,65.96 IC7.5 | v77.5,54.99 78.41,54.08 78.41,39.45 66.75,27.79 v65.61,27.79
  Bottom 0.254: v76.35,62.76 76.35,61.62 77.5,60.48 v77.5,54.99 | v65.61,27.79 45.95,8.13 32.23,8.13 27.66,12.7 J4.1
S1-5V4
  Top 0.254: IC3.12 4.8,59.56 4.12,59.56 3.43,58.88 3.43,55.91 7.09,52.25 7.09,21.84 18.97,9.96 19.89,9.96 J4.6
S1-5V5  (via drill 0.61)
  Top 0.254: v65.38,65.51 65.84,65.96 67.21,65.96 IC7.10 | v69.95,56.36 69.95,52.48 v56.92,39.45
  Bottom 0.254: v65.38,65.51 65.38,60.94 v69.95,56.36 | v56.92,39.45 56.92,37.85 66.52,28.25 66.52,27.33 46.86,7.67 19.89,7.67 13.03,14.53 13.03,20.47 J3.1
SCK  (via drill 0.61)
  Top 0.254: v30.18,59.33 31.09,58.42 35.89,58.42 36.58,57.73 43.66,57.73 43.89,57.51 47.78,57.51 v51.89,61.62 | v55.32,65.05 55.32,68.94 v57.15,70.76 | v37.49,72.82 34.29,76.02 J1.23
  Bottom 0.254: v30.18,59.33 29.95,59.56 21.95,59.56 20.57,60.94 19.2,60.94 IC2.13 | v55.32,65.05 v51.89,61.62 | JP4.3 91.44,73.51 84.81,66.88 64.47,66.88 60.58,70.76 v57.15,70.76 45.03,70.76 42.98,72.82 v37.49,72.82
SCL
  Top 0.254: U$2.6 39.78,66.65 41.15,65.28 41.15,60.25 41.6,59.79 42.98,59.79 44.12,60.94 R16.2
SDA
  Top 0.254: U$2.5 39.78,65.28 39.78,60.94 41.38,59.33 44.35,59.33 45.26,60.25 45.26,63.68 44.35,64.59 R15.2
SQ  (via drill 0.61)
  Top 0.254: v36.8,68.02 39.55,68.02 U$2.7 | v29.72,70.08 29.72,68.94 29.49,68.71 R11.1
  Bottom 0.254: v36.8,68.02 31.77,68.02 v29.72,70.08
TX  (via drill 0.61)
  Top 0.254: v91.9,23.44 91.9,19.33 79.78,7.21 20.34,7.21 6.63,20.93 6.63,52.02 1.83,56.82 1.83,76.02 5.94,80.14 12.57,80.14 J1.8
  Bottom 0.254: v91.9,23.44 91.9,50.88 92.58,51.56 92.58,74.88 91.9,75.56 85.95,75.56 84.12,73.74 80.01,73.74 JP3.1